# Altium PCB 四轴.PcbDoc
Units mm, origin at the board's own origin, x right, y up, seen from the top; angles counter-clockwise.
Board outline 99.94 x 99.97 mm, 2 copper layers (Top Layer, Bottom Layer); 73 components, 53 nets, 246 pads, 37 vias.
Unrouted connection lines stored in the file: 4.
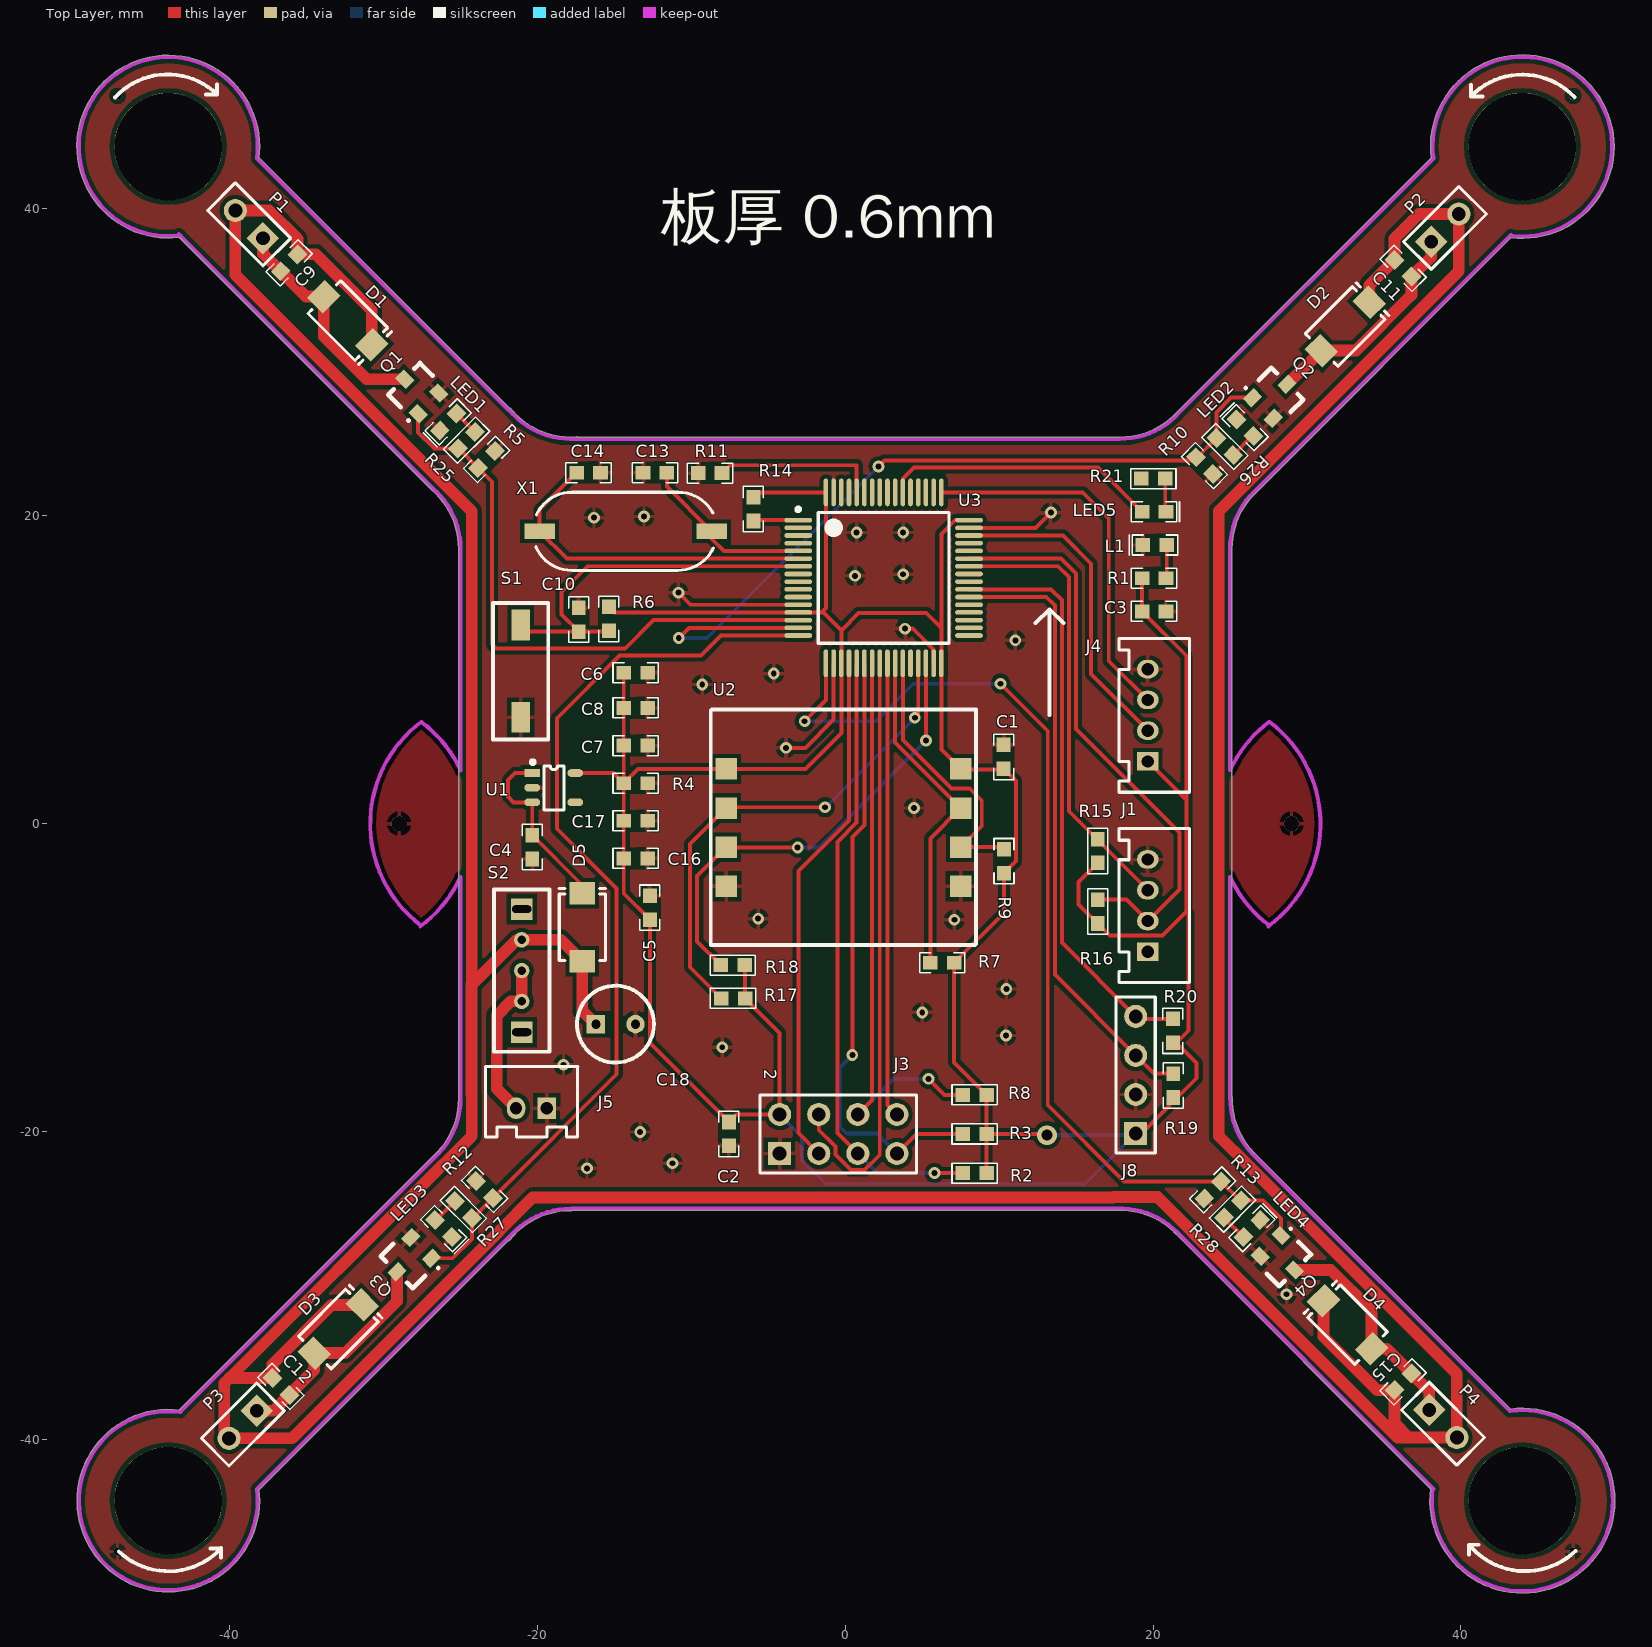
[diagram p0: Top Layer view]
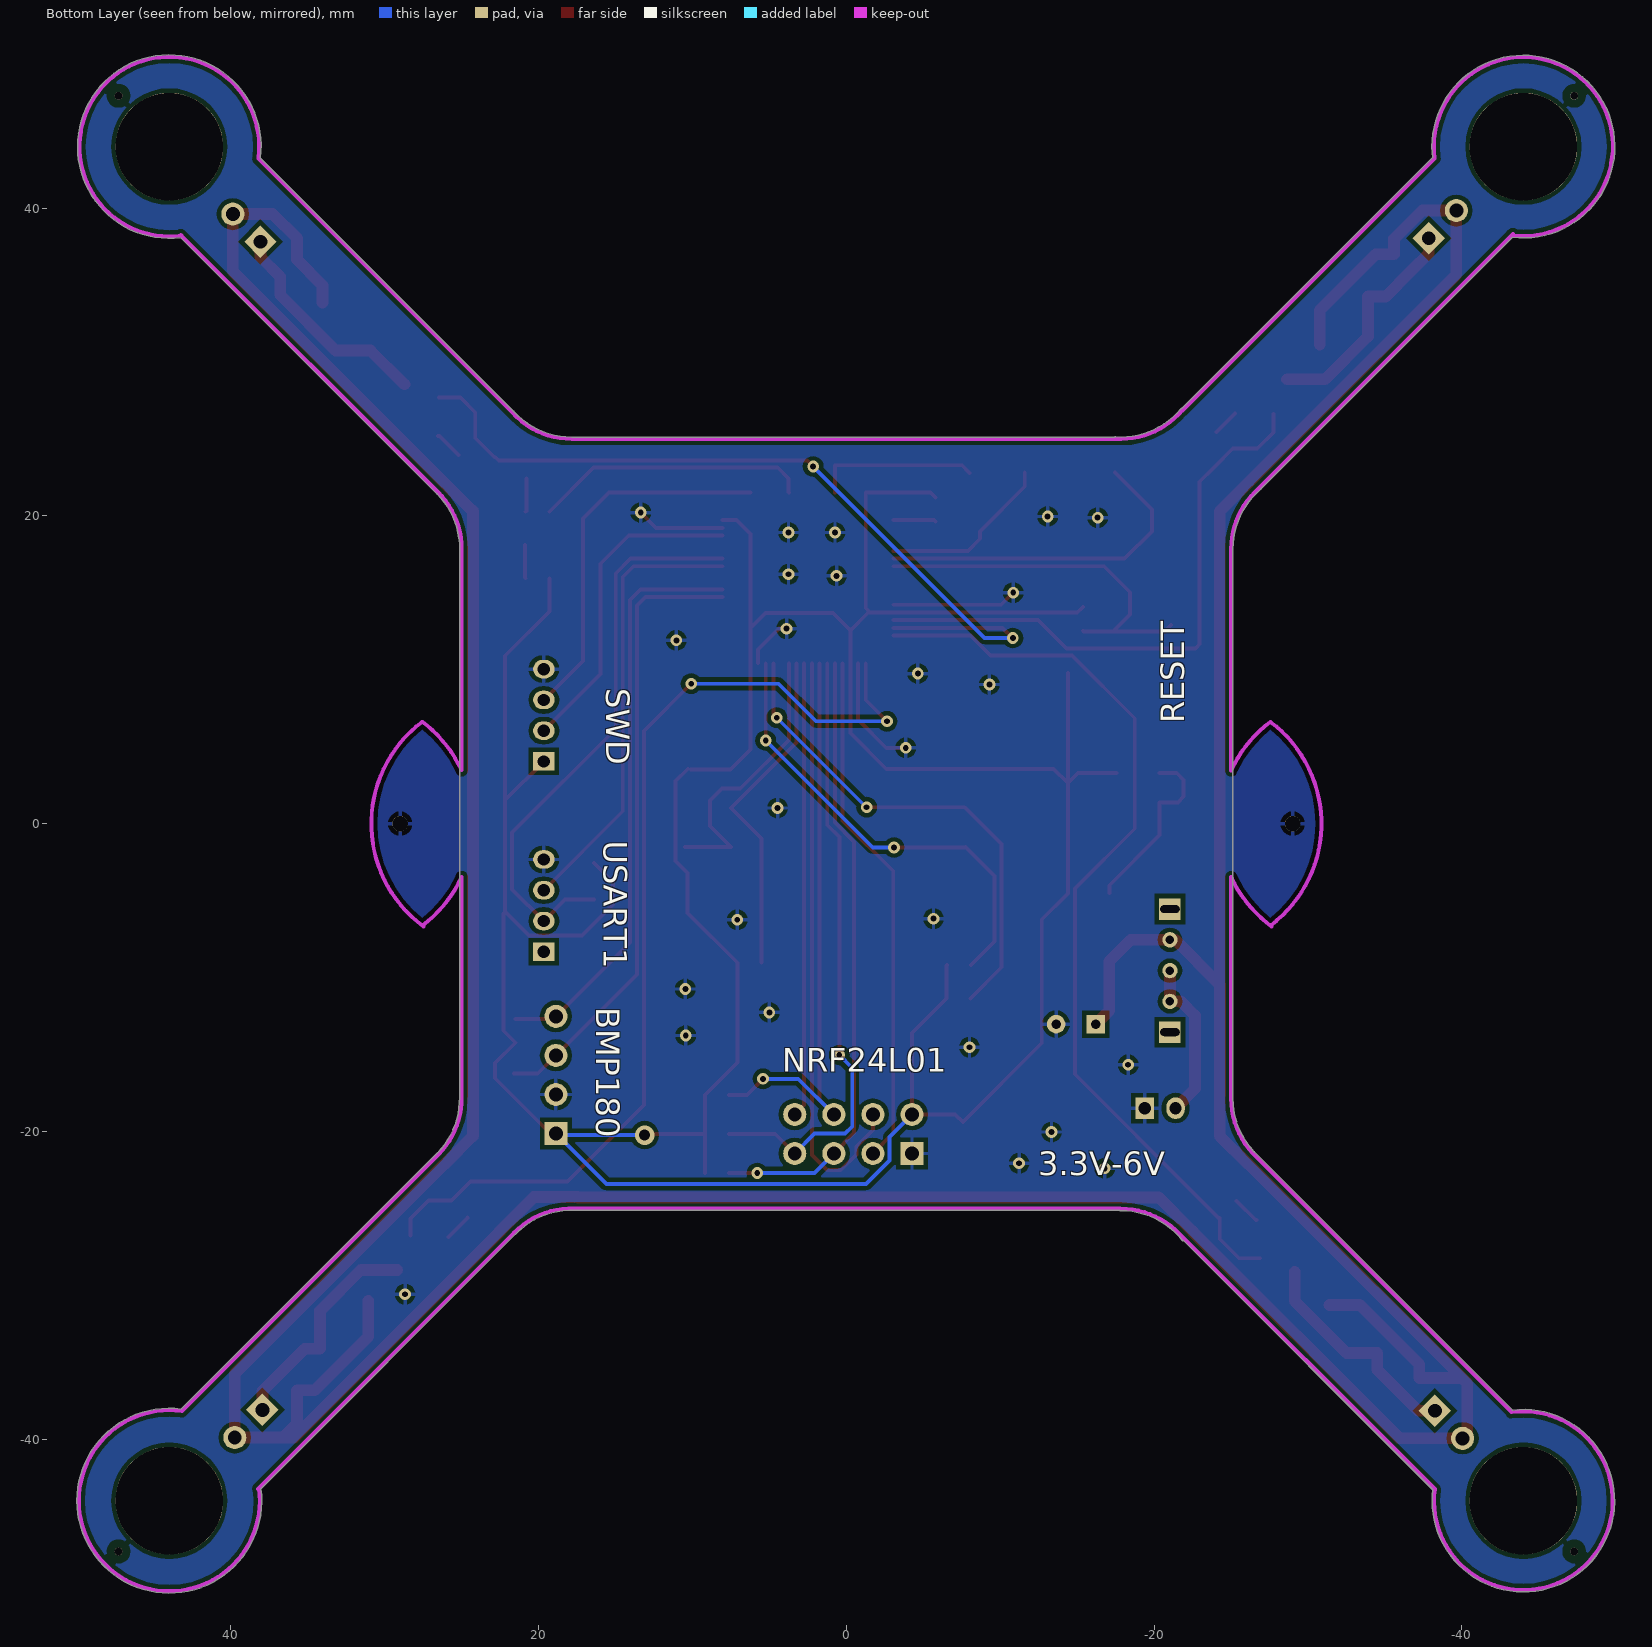
[diagram p1: Bottom Layer view, seen from below]

## Layer stack, top to bottom
Top Layer: signal copper 0.0356
Dielectric: dielectric 0.32, FR-4, Dk 4.8
Bottom Layer: signal copper 0.0356

## Board outline
-43.293,-38.112 ccw(c-44,-44) -38.07,-44 ccw(c-44,-44) -38.112,-43.293 -21.937,-27.118 ccw(c-21.929,-26.991) -21.829,-27.07 cw(c-17.856,-30.226) -17.828,-25.152 ccw(c-17.827,-25.024) -17.752,-25.127 17.63,-25.127 ccw(c17.653,-25.002) 17.658,-25.129 cw(c17.85,-30.2) 21.473,-26.647 ccw(c21.583,-26.583) 21.493,-26.673 38.044,-43.224 ccw(c44,-44) 50.006,-44 ccw(c44,-44) 43.224,-38.044 26.587,-21.406 ccw(c26.496,-21.496) 26.573,-21.395 cw(c30.21,-17.856) 25.136,-17.784 ccw(c25.009,-17.783) 25.136,-17.783 ccw(c25.009,-17.783) 25.127,-17.736 25.127,17.831 ccw(c25,17.831) 25.126,17.847 cw(c30.201,17.856) 26.602,21.433 ccw(c26.55,21.55) 26.64,21.46 43.264,38.084 ccw(c44,44) 49.961,44 ccw(c44,44) 38.084,43.264 21.622,26.802 ccw(c21.703,26.704) 21.608,26.789 cw(c17.852,30.201) 17.84,25.126 ccw(c17.824,25) 17.824,25.127 -17.434,25.127 ccw(c-17.484,25.01) -17.493,25.137 cw(c-17.833,30.2) -21.736,26.957 ccw(c-21.834,26.876) -21.823,27.003 -38.104,43.284 ccw(c-44,44) -38.061,44 ccw(c-44,44) -43.284,38.104 -26.944,21.764 ccw(c-26.824,21.808) -26.907,21.711 cw(c-30.2,17.85) -25.126,17.874 ccw(c-25,17.854) -25.127,17.854 -25.127,-17.856 ccw(c-25,-17.856) -25.126,-17.872 cw(c-30.201,-17.856) -26.494,-21.321 ccw(c-26.434,-21.434) -26.524,-21.344

## Design rules (kind name [scope] priority, off if disabled: settings)
Clearance Clearance_1 [InPolygon] p1: gap=0.279
Clearance mcu [InComponent('U3')] p2: gap=0.178
Clearance [All] p3: gap=0.203
ComponentClearance [All] p1: gap=0 collisioncheckmode=3 verticalgap=0 showdistances=TRUE
HoleSize [All] p1: absolutevalues=TRUE maxlimit=7.62 minlimit=0.203 maxpercent=80.000 minpercent=20.000
MinimumSolderMaskSliver [All] p1: minsoldermaskwidth=0.127
PolygonConnect [All] p1: connectstyle=Relief reliefconductorwidth=0.254 reliefentries=4 polygonreliefangle="90 Angle"
RoutingVias [All] p1: holewidth=0.381 width=0.762 viastyle="Through Hole" minholewidth=0.127 minwidth=0.254 maxholewidth=1.016 maxwidth=1.27
SilkToSilkClearance [All] p1: silktosilkclearance=0.178
SilkscreenOverComponentPads [All] p1: minsilkscreentomaskgap=0.127
SolderMaskExpansion [All] p1: expansion=0.102
Width [All] p1: maxlimit=1.27 minlimit=0.254 preferedwidth=0.254
23 further rules are at their usual default settings.

## Components (designator, comment, footprint, x,y, rotation, side; value= is the part's Value field where it differs from the comment)
C1 "0.1uF" 0603 10.287,4.343 r90 top
C2 "0.1uF" 0603 -7.569,-20.168 r270 top
C3 "0.1uF" 0603 20.069,13.792 r0 top
C4 "1uF" 0603 -20.345,-1.524 r90 top
C5 "10uF" 0603 -12.7,-5.461 r90 top
C6 "0.1uF" 0603 -13.621,9.804 r0 top
C7 "0.1uF" 0603 -13.621,5.074 r180 top
C8 "0.1uF" 0603 -13.621,7.518 r180 top
C9 "0.1uF" 0603 -36.144,36.449 r45 top
C10 "0.1uF" 0603 -17.323,13.259 r90 top
C11 "0.1uF" 0603 36.246,36.093 r135 top
C12 "0.1uF" 0603 -36.678,-36.576 r135 top
C13 "20pF" 0603 -12.37,22.809 r0 top
C14 "20pF" 0603 -16.688,22.809 r180 top
C15 "0.1uF" 0603 36.246,-36.271 r225 top
C16 "1uF" 0603 -13.621,-2.261 r180 top
C17 "0.1uF" 0603 -13.621,0.184 r180 top
C18 "100uF" CAP_5X8_2.5 -14.935,-13.03 r180 top
D1 "SS14" SMA -32.334,32.69 r315 top
D2 "SS14" SMA 32.487,32.309 r45 top
D3 "SS14" SMA -32.944,-32.842 r45 top
D4 "SS14" SMA 32.639,-32.563 r135 top
D5 "SS14" SMA -17.094,-6.731 r90 top
J1 "PH2.0-4P" PH2.0-4P 19.66,-3.327 r90 top
J3 "Header 4X2" HDR2X4 -4.267,-21.438 r0 top
J4 "PH2.0-4P" PH2.0-4P 19.66,9.042 r90 top
J5 "Header 2" PH2.0-2P -20.396,-18.491 r180 top
J8 "PH2.0-4P" HDR1X4 18.872,-20.142 r90 top
L1 "LED" 0603_LED 20.117,18.11 r180 top
LED1 "LED-Y" 0603_LED -25.806,26.111 r225 top
LED2 "LED-Y" 0603_LED 25.984,25.73 r135 top
LED3 "LED-Y" 0603_LED -26.111,-26.314 r315 top
LED4 "LED-Y" 0603_LED 26.416,-26.314 r45 top
LED5 "LED-Y" 0603_LED 20.069,20.269 r0 top
P1 "Header 2" HDR1X2 -37.846,38.049 r135 top
P2 "Header 2" HDR1X2 38.075,37.821 r45 top
P3 "Header 2" HDR1X2 -38.252,-38.151 r225 top
P4 "Header 2" HDR1X2 37.948,-38.1 r315 top
Q1 "AO3400" SOT-23 -27.864,28.092 r135 top
Q2 "AO3400" SOT-23 27.915,27.788 r45 top
Q3 "AO3400" SOT-23 -28.346,-28.346 r225 top
Q4 "AO3400" SOT-23 28.423,-28.219 r315 top
R1 "1K" 0603 20.069,15.951 r180 top
R2 "10K" C0603_M1608 8.407,-22.708 r180 top
R3 "10K" C0603_M1608 8.407,-20.168 r180 top
R4 "1K" 0603 -13.621,2.629 r180 top
R5 "10K" 0603 -23.317,23.673 r225 top
R6 "10K" 0603 -15.367,13.31 r270 top
R7 "10K" 0603 6.299,-9.042 r180 top
R8 "10K" C0603_M1608 8.407,-17.628 r180 top
R9 "10K" 0603 10.312,-2.438 r90 top
R10 "10K" 0603 23.343,23.266 r135 top
R11 "10K" 0603 -8.788,22.784 r180 top
R12 "10K" 0603 -23.444,-23.774 r315 top
R13 "10K" 0603 23.876,-23.8 r45 top
R14 "0R" 0603 -5.969,20.447 r270 top
R15 "10K" C0603_M1608 16.408,-1.778 r90 top
R16 "10K" C0603_M1608 16.408,-5.715 r90 top
R17 "10K" C0603_M1608 -7.29,-11.354 r0 top
R18 "10K" C0603_M1608 -7.315,-9.195 r0 top
R19 "10K" 0603 21.311,-17.018 r90 top
R20 "10K" 0603 21.285,-13.462 r90 top
R21 "1K" C0603_M1608 20.015,22.428 r0 top
R25 "1K" C0603_M1608 -24.613,24.917 r225 top
R26 "1K" C0603_M1608 24.663,24.511 r135 top
R27 "1K" C0603_M1608 -24.816,-25.07 r315 top
R28 "1K" C0603_M1608 25.171,-25.044 r45 top
S1 "SW-PB" SW-KEY -19.304,13.919 r270 top
S2 "SS12D07" SS-12D07 -21.031,-9.55 r270 top
U1 "XC6503D331" SOT23-5 -18.948,2.337 r0 top
U2 "MPU6050S" MPU6050S -7.747,3.556 r0 top
U3 "STM32F103RCT6" LQFP64_N 2.489,15.977 r0 top
X1 "8M" HC-49SMD -14.275,18.999 r0 top

## Footprints (in the part's own frame and the unit in brackets; to place one, negate y for a bottom-side part, rotate by r counter-clockwise, add the part's x,y. Pads: shape width x height; smd on the part's side, far side on the other; paste and mask are expansions set on the pad)
0603 [mm]
  rect 0.95x0.9 smd: 1(-0.775,0) 2(0.775,0)
  silkscreen extent -1.48,-0.65 1.47,0.65
0603_LED [mm]
  rect 0.95x0.9 smd: 1(-0.775,0) 2(0.775,0)
  silkscreen extent -1.48,-0.65 1.65,0.65
C0603_M1608 [mm] "Chip Capacitor, 2-Leads, Bo"
  rect 0.95x0.9 smd: 1(-0.775,0) 2(0.775,0)
  silkscreen extent -1.48,-0.65 1.48,0.65
CAP_5X8_2.5 [mm]
  rect 1.2x1.2 hole 0.6: 1(1.275,0)
  round 1.2 hole 0.6: 2(-1.3,0)
  silkscreen extent -2.5,-2.5 2.5,2.5
HC-49SMD [mm]
  rect 2x1 smd: 1(-5.588,0) 2(5.588,0)
  silkscreen extent -5.84,-2.54 5.7,2.54
HDR1X2 [mm] "Connector; Hea"
  rect 1.5x1.5 hole 0.9: 1(0,0)
  round 1.5 hole 0.9: 2(2.54,0)
  silkscreen extent -1.27,-1.27 3.81,1.27
HDR1X4 [mm] "Connector; H"
  rect 1.5x1.5 hole 0.9: 1(0,0)
  round 1.5 hole 0.9: 2(2.54,0) 3(5.08,0) 4(7.62,0)
  silkscreen extent -1.27,-1.27 8.89,1.27
HDR2X4 [mm] "Connector; Heade"
  rect 1.5x1.5 hole 0.9: 1(0,0)
  round 1.5 hole 0.9: 2(0,2.54) 3(2.54,0) 4(2.54,2.54) 5(5.08,0) 6(5.08,2.54) 7(7.62,0) 8(7.62,2.54)
  silkscreen extent -1.27,-1.27 8.89,3.81
LQFP64_N [mm]
  oval 1.8x0.3 smd: 1(-5.55,3.75) 2(-5.55,3.25) 3(-5.55,2.75) 4(-5.55,2.25) 5(-5.55,1.75) 6(-5.55,1.25) 7(-5.55,0.75) 8(-5.55,0.25) 9(-5.55,-0.25) 10(-5.55,-0.75) 11(-5.55,-1.25) 12(-5.55,-1.75) 13(-5.55,-2.25) 14(-5.55,-2.75) 15(-5.55,-3.25) 16(-5.55,-3.75) 33(5.55,-3.75) 34(5.55,-3.25) 35(5.55,-2.75) 36(5.55,-2.25) 37(5.55,-1.75) 38(5.55,-1.25) 39(5.55,-0.75) 40(5.55,-0.25) 41(5.55,0.25) 42(5.55,0.75) 43(5.55,1.25) 44(5.55,1.75) 45(5.55,2.25) 46(5.55,2.75) 47(5.55,3.25) 48(5.55,3.75)
  oval 0.3x1.8 smd: 17(-3.75,-5.55) 18(-3.25,-5.55) 19(-2.75,-5.55) 20(-2.25,-5.55) 21(-1.75,-5.55) 22(-1.25,-5.55) 23(-0.75,-5.55) 24(-0.25,-5.55) 25(0.25,-5.55) 26(0.75,-5.55) 27(1.25,-5.55) 28(1.75,-5.55) 29(2.25,-5.55) 30(2.75,-5.55) 31(3.25,-5.55) 32(3.75,-5.55) 49(3.75,5.55) 50(3.25,5.55) 51(2.75,5.55) 52(2.25,5.55) 53(1.75,5.55) 54(1.25,5.55) 55(0.75,5.55) 56(0.25,5.55) 57(-0.25,5.55) 58(-0.75,5.55) 59(-1.25,5.55) 60(-1.75,5.55) 61(-2.25,5.55) 62(-2.75,5.55) 63(-3.25,5.55) 64(-3.75,5.55)
  silkscreen extent -5.67,-4.25 4.25,4.57, body extent -5,-5 5,5, height 1.6
MPU6050S [mm]
  rect 1.4x1.4 smd: 1(0,0) 2(0,-2.54) 3(0,-5.08) 4(0,-7.62) 5(15.24,0) 6(15.24,-2.54) 7(15.24,-5.08) 8(15.24,-7.62)
  silkscreen extent -1,-11.43 16.25,3.88
PH2.0-2P [mm]
  rect 1.2x1.4 hole 0.8: 1(-1,0)
  oval 1.2x1.4 hole 0.8: 2(1,0)
  silkscreen extent -3.01,-2.72 3,1.88
PH2.0-4P [mm]
  rect 1.2x1.4 hole 0.8: 1(-5,0)
  oval 1.2x1.4 hole 0.8: 2(-3,0) 3(-1,0) 4(1,0)
  silkscreen extent -7.01,-2.72 3,1.88
SMA [mm]
  rect 1.45x1.65 smd: 1(-2.21,0) 2(2.21,0)
  silkscreen extent -2.16,-1.5 2.51,1.5
SOT23-5 [mil] "SOT23, 5-Leads, Body 3.1x3.0mm (max), Pitch"
  rect 40x20 smd: 1(-55,37.4)
  oval 40x20 smd: 2(-55,0) 3(-55,-37.4) 4(55,-37.4) 5(55,37.4)
  silkscreen extent -59,-57 26,70
SOT-23 [mm]
  rect 1x0.8 smd: 1(-1.1,0.952) 2(-1.1,-0.952) 3(1.1,-0.013)
  silkscreen extent -0.97,-1.46 1.14,1.71
SS-12D07 [mm]
  round 1 hole 0.55: 1(-2,0) 2(0,0) 3(2,0)
  rect 1.4x1.4 hole 0.5 slot 1.25 at 90 deg: ""(-4,0) ""(4,0)
  silkscreen extent -5.28,-1.8 5.28,1.8
SW-KEY [mm]
  rect 2x1.2 smd: 1(1,-1.8) 2(7,-1.8)
  silkscreen extent -0.43,-3.6 8.45,0

## Part data
C1 C2 C3 C4 C5 C6 C7 C8 C9 C10 C11 C12 C13 C14 C15 C16 C17: library part Cap, "Cap"
C18: library part Cap2
J1 J4: library part "Header 4", "Header,"
J3: "Header, 4-Pin, Dual row"
J5: "Header,"
J8: library part "Header 4", "Header, 4-Pin"
P1 P2 P3 P4: "Header, 2-Pin"
Q1 Q2 Q3 Q4: library part MOS-N
R1 R4 R5 R6 R7 R9 R10 R11 R12 R13 R14 R19 R20: library part Res1, "Re"
R2 R3 R8 R15 R16 R17 R18 R21 R25 R26 R27 R28: library part Res, "电阻0603"
U1: library part XC6503Dxxx
U3: "256K Flash 48K RAM"

## Free pads (board coordinates)
  round 7 hole 7: 0(-44,-44) 0(-44,44) 0(44,-44) 0(44,44)
  round 1 hole 1: 0(-29,0) 0(29,0)
  round 0.5 hole 0.5: 1(-47.3,-47.3) 1(-47.3,47.3) 1(47.3,-47.3) 1(47.3,47.3)

## Via types
v1: diameter 0.762, hole 0.381, Top Layer to Bottom Layer, tented both sides, 22 vias
v2: diameter 0.762, hole 0.381, Top Layer to Bottom Layer, 14 vias
v3: diameter 1.27, hole 0.711, Top Layer to Bottom Layer, tented both sides, 1 vias

## Nets (pads, with @x,y where several pads share a name; then routed paths per layer and width w, separated by ;. In a path a pad name is that pad's centre, name@x,y a point inside that pad or via, vN(x,y) a via of type N, cw(c..) or ccw(c..) an arc to the next point about the centre after c; other vN are vias at no path point)
BMP180_SCL: J8.3 R19.2 U3.38 | length 40.4
  Top Layer w0.254: U3.38 13.061,14.727 13.614,14.173 13.614,-9.804 J8.3 20.053,-16.243 R19.2@21.59,-16.243
BMP180_SDA: J8.4 R20.2 U3.39 | length 38.1
  Top Layer w0.254: U3.39 13.374,15.227 14.072,14.529 14.072,-7.722 J8.4 19.037,-12.687 R20.2@21.514,-12.687
BOOT0: R11.1 U3.60 | length 10.7
  Top Layer w0.254: R11.1 -7.505,23.292 0.739,23.292 U3.60
ESP_CH_PD: U3.40
ESP_GP0: U3.2
ESP_GP2: U3.3
ESP_GP16: U3.4
ESP_URXD: U3.51
ESP_UTXD: U3.52
GND: C1.2 C2.2 C3.2 C4.1 C5.2 C6.2 C7.1 C8.1 C10.2 C13.1 C14.1 C16.1 C17.1 C18.2 J1.4 J3.1 J4.4 J5.1 J8.2 L1.2 LED1.2 LED2.2 LED3.2 LED4.2 pad.0@29,0 pad.0@-29,0 pad.1@47.3,-47.3 pad.1@-47.3,-47.3 Q1.2 Q2.2 Q3.2 Q4.2 R4.1 R5.1 R10.1 R11.2 R12.1 R13.1 R21.1 S1.2 U1.2 U2.4 U2.8 U3.12 U3.18 U3.31 U3.47 U3.63 | length 24.7
  Top Layer w0.254: v1(-10.846,15.011) -10.061,14.227 U3.12 ; v1(-3.861,4.928) -2.591,4.928 -0.761,6.758 U3.18 ; v1(3.886,12.675) 4.384,12.675 5.739,11.32 U3.31 ; U3.47 12.369,19.227 v1(13.36,20.218)
  other v1: 28.677,-30.582 10.439,-13.767 10.465,-10.744 7.087,-6.248 -5.664,-6.172 -16.332,19.888 -13.081,19.964
  other v2: -16.789,-22.403 -11.227,-22.073 -13.335,-20.041 -18.313,-15.672 -8.001,-14.529 5.004,-12.268 4.47,1.016 -9.296,9.042 -4.648,9.754 11.049,11.913 0.635,16.104 3.759,16.205 0.737,18.923 3.759,18.923
HC-RX: U3.53
M1_PWM: Q1.1 R5.2 R25.2 U3.14 | length 38.7
  Top Layer w0.254: Q1.1 -27.76,25.423 -26.706,24.369 R25.2 -25.11,24.369 R5.2 -22.962,22.221 -22.962,11.659 -22.682,11.379 -14.3,11.379 -12.453,13.227 U3.14
M2_PWM: Q2.1 R10.2 R26.2 U3.15 | length 52.8
  Top Layer w0.254: v1(-10.82,12.065) -10.159,12.727 U3.15 ; v1(2.159,23.216) 2.54,23.597 22.577,23.597 R10.2 22.871,23.814 R26.2 24.115,26.732 25.067,27.683 Q2.1
  Bottom Layer w0.254: v1(-10.82,12.065) -8.992,12.065 v1(2.159,23.216)
M3_PWM: Q3.1 R12.2 R27.2 U3.16 | length 60.4
  Top Layer w0.254: Q3.1 -25.524,-28.242 -24.268,-26.986 R27.2 -24.192,-25.618 R12.2 -14.859,-16.285 -14.859,-4.216 -18.745,-0.33 -18.745,6.848 -14.671,10.922 -9.373,10.922 -8.068,12.227 U3.16
M4_PWM: Q4.1 R13.2 R28.2 U3.17 | length 66.1
  Top Layer w0.254: v1(-2.642,6.655) -1.261,8.036 U3.17 ; v1(10.084,9.093) 13.157,6.02 13.157,-18.288 18.121,-23.252 R13.2 25.669,-24.496 R28.2 27.163,-24.496 28.318,-25.651 Q4.1
  Bottom Layer w0.254: v1(-2.642,6.655) 1.981,6.655 4.42,9.093 v1(10.084,9.093)
MPU6050_RX: R17.1 U2.2 U3.29 | length 32.7
  Top Layer w0.254: R17.1 -10.084,-9.335 -10.084,-1.321 U2.2 -7.696,1.067 v1(-1.321,1.067) ; v1@4.521,6.655 v1(4.521,6.883) 4.739,7.101 U3.29
  Bottom Layer w0.254: v1(-1.321,1.067) -1.295,1.067 v1(4.521,6.883)
MPU6050_SCL: R7.2 U2.6 U3.26 | length 22
  Top Layer w0.254: U3.26 3.239,5.27 U2.6 5.524,-0.953 R7.2
MPU6050_SDA: R9.2 U2.7 U3.27 | length 18.4
  Top Layer w0.254: U3.27 3.739,5.443 6.896,2.286 8.09,2.286 8.865,1.511 8.865,-0.152 U2.7 R9.2@10.503,-1.524
MPU6050_TX: R18.1 U2.3 U3.30 | length 30
  Top Layer w0.254: R18.1 -9.627,-7.658 -9.627,-3.404 U2.3 -7.722,-1.549 v1(-3.099,-1.549) ; v1(5.239,5.403) U3.30
  Bottom Layer w0.254: v1(-3.099,-1.549) -1.714,-1.549 v1(5.239,5.403)
NetC4_2: C4.2 D5.2 U1.1 U1.3 | length 11.7
  Top Layer w0.254: U1.3@-20.476,1.387 -21.554,1.387 -21.92,1.753 -21.92,2.84 -21.473,3.287 U1.1 ; U1.3 C4.2 -17.094,-4 D5.2
NetC9_1: C9.1 D1.1 P1.1 Q1.3 | length 15.1
  Top Layer w0.762: P1.1 -37.846,37.055 C9.1 -35.044,34.252 D1.1 -33.897,31.662 -31.114,28.879 Q1.3
NetC11_1: C11.1 D2.1 P2.1 Q2.3 | length 14.5
  Top Layer w0.762: Q2.3 28.734,28.556 D2.1 33.185,30.746 36.794,34.355 C11.1 38.075,36.826 P2.1
NetC12_1: C12.1 D3.1 P3.1 Q3.3 | length 14.6
  Top Layer w0.762: P3.1 -37.156,-38.151 C12.1 -34.506,-35.501 D3.1 -32.513,-34.405 -29.133,-31.025 Q3.3
NetC13_2: C13.2 U3.5 X1.2 | length 11.5
  Top Layer w0.254: C13.2 -11.595,21.907 X1.2 -8.687,18.517 -7.897,17.727 U3.5
NetC14_2: C14.2 U3.6 X1.1 | length 22.3
  Top Layer w0.254: C14.2 -19.863,20.409 X1.1 -18.09,17.227 U3.6
NetC15_1: C15.1 D4.1 P4.1 Q4.3 | length 14.7
  Top Layer w0.762: Q4.3 31.546,-29.006 34.202,-31.662 D4.1 35.196,-34.125 C15.1 37.948,-36.877 P4.1
NetJ5_2: J5.2 S2.2 S2.3 | length 10.5
  Top Layer w0.762: J5.2 -22.657,-17.231 -22.657,-12.471 -21.736,-11.55 S2.3 S2.2
NetL1_1: L1.1 R1.1 | length 2.2
  Top Layer w0.254: R1.1 20.892,15.999 L1.1
NetLED1_1: LED1.1 R25.1 | length 1.7
  Top Layer w0.254: LED1.1 R25.1
NetLED2_1: LED2.1 R26.1 | length 1.8
  Top Layer w0.254: R26.1 26.431,25.182 LED2.1
NetLED3_1: LED3.1 R27.1 | length 1.8
  Top Layer w0.254: LED3.1 -26.608,-25.766 R27.1
NetLED4_1: LED4.1 R28.1 | length 1.8
  Top Layer w0.254: R28.1 24.623,-25.618 LED4.1
NetLED5_1: LED5.1 U3.54 | length 17.9
  Top Layer w0.254: U3.54 3.759,21.547 3.759,22.44 4.459,23.139 16.424,23.139 LED5.1
NetLED5_2: LED5.2 R21.2 | length 2.2
  Top Layer w0.254: R21.2 20.79,20.323 LED5.2
NetR14_2: R14.2 U3.1 | length 2.8
  Top Layer w0.254: R14.2@-5.791,19.647 -5.711,19.727 U3.1
NRF_CE: J3.3 U3.20 | length 33.8
  Top Layer w0.254: J3.3 -3.048,-20.117 -3.048,-3.073 0.239,0.214 U3.20
NRF_CSN: J3.4 U3.24 | length 38.7
  Top Layer w0.254: J3.4 -1.727,-19.91 -0.647,-20.99 -0.647,-21.505 0.365,-22.518 1.26,-22.518 2.239,-21.539 U3.24
NRF_IRQ: J3.8 U3.25 | length 29.6
  Top Layer w0.254: U3.25 2.739,-18.284 J3.8
NRF_MISO: J3.7 R3.2 U3.22 | length 40
  Top Layer w0.254: v1(0.457,-15.037) 0.457,-0.861 1.239,-0.079 U3.22 ; J3.7 4.623,-20.168 R3.2
  Bottom Layer w0.254: v1(0.457,-15.037) -0.381,-15.875 -0.381,-19.685 0.076,-20.142 2.057,-20.142 J3.7
NRF_MOSI: J3.6 R8.2 U3.23 | length 37.9
  Top Layer w0.254: J3.6 1.739,-17.971 U3.23 ; v1(5.41,-16.586) 6.452,-17.628 R8.2
  Bottom Layer w0.254: J3.6 3.124,-16.586 v1(5.41,-16.586)
NRF_SCK: J3.5 R2.2 U3.21 | length 40.3
  Top Layer w0.254: U3.21 0.739,0.067 -0.508,-1.18 -0.508,-20.117 J3.5 ; v1(5.791,-22.708) R2.2
  Bottom Layer w0.254: J3.5 2.083,-22.708 v1(5.791,-22.708)
OLED_CS: U3.33
OLED_D0_SCK: U3.34
OLED_D1_MOSI: U3.36
OLED_DC: U3.37
OLED_RES: U3.35
RST: C10.1 R6.2 S1.1 U3.7 | length 25
  Top Layer w0.254: S1.1 -20.669,12.484 C10.1 ; R6.2 -15.418,12.484 C10.1 ; U3.7 -16.751,16.727 -18.44,15.037 -18.44,13.601 C10.1
SWCLK: J4.3 U3.49 | length 24.4
  Top Layer w0.254: U3.49 15.43,21.527 17.12,19.837 17.12,10.582 J4.3
SWDIO: J4.2 U3.46 | length 21.1
  Top Layer w0.254: U3.46 14.141,18.727 15.977,16.891 15.977,9.725 J4.2
UART1RX: J1.2 R16.2 U3.43 | length 37.4
  Top Layer w0.254: U3.43 14.015,17.227 14.986,16.256 14.986,6.147 21.717,-0.584 21.717,-4.27 J1.2 18.272,-4.94 R16.2
UART1TX: J1.3 R15.2 U3.42 | length 29.3
  Top Layer w0.254: U3.42 13.83,16.727 14.529,16.027 14.529,0.803 J1.3
VCC-3.3V: C1.1 C2.1 C3.1 C5.1 C6.1 C7.2 C8.2 C16.2 C17.2 J3.2 J4.1 J8.1 R1.2 R2.1 R3.1 R4.2 R6.1 R7.1 R8.1 R9.1 R14.1 R15.1 R16.1 R17.2 R18.2 R19.1 R20.1 U1.5 U2.1 U2.5 U3.13 U3.19 U3.32 U3.48 U3.64 | length 249.4
  Top Layer w0.254: U1.5 -15.054,3.287 R4.2 ; R6.1 -15.009,13.727 U3.13 -1.544,13.727 ; C6.1 R4.2 ; R18.2 -6.515,-9.22 R17.2 -4.267,-13.601 J3.2 -7.074,-18.898 C2.1 -12.7,-14.262 C5.1 -14.396,-4.54 C16.2 R4.2 ; R14.1@-5.791,21.197 -5.461,21.527 U3.64 -1.261,14.01 -1.544,13.727 ; 6.239,12.709 5.258,13.691 0.864,13.691 -0.261,12.566 ; U3.48 7.146,19.727 6.239,18.82 U3.32 6.239,4.81 U2.5 7.531,3.518 C1.1@10.109,3.518 ; R2.1 R3.1 ; C1.1 11.093,2.763 11.093,-2.433 R9.1 10.312,-5.804 R7.1 7.074,-15.519 R8.1 R3.1 ; v3(13.106,-20.244) 13.03,-20.168 R3.1 ; R15.1 15.164,-3.798 15.164,-5.245 R16.1 17.183,-7.264 20.625,-7.264 22.174,-5.715 ; J8.1 19.241,-20.142 22.835,-16.548 22.835,-15.558 21.514,-14.237 22.294,-13.457 22.294,-5.835 22.174,-5.715 ; R1.2 C3.1 22.174,10.912 22.174,1.528 ; J4.1 22.174,1.528 ; R4.2 -13.469,3.556 U2.1 -2.591,3.556 -0.261,5.886 U3.19 -0.261,12.566 ; -1.544,13.727 -1.421,13.727 -0.261,12.566 ; 22.174,-5.715 22.174,1.528
  Bottom Layer w0.254: J3.2 -2.807,-20.357 -2.807,-21.885 -1.274,-23.419 15.596,-23.419 J8.1@18.771,-20.244 ; v3(13.106,-20.244) J8.1@18.771,-20.244 ; J8.1 J8.1@18.771,-20.244
VCC-5V: C9.2 C11.2 C12.2 C15.2 C18.1 D1.2 D2.2 D3.2 D4.2 D5.1 P1.2 P2.2 P3.2 P4.2 S2.1 | length 338.6
  Top Layer w0.762: D3.2 -33.374,-31.28 -37.226,-35.131 C12.2 -40.022,-36.028 ; D1.2 -30.772,33.362 -34.406,36.997 C9.2 -35.596,38.009 -37.432,39.845 P1.2 -39.642,35.68 -24.269,20.307 -24.269,-10.458 ; C18.1 -17.094,-12.146 D5.1 -18.485,-7.55 S2.1 -21.361,-7.55 -24.269,-10.458 ; D4.2 31.076,-33.337 34.559,-36.819 C15.2 35.698,-38.967 36.627,-39.896 ; D2.2 34.049,34.993 C11.2 35.698,38.035 37.28,39.617 P2.2 39.871,35.914 24.27,20.313 24.27,-20.297 26.14,-22.167 26.162,-22.167 39.744,-35.749 P4.2 36.627,-39.896 ; -40.022,-36.028 -40.353,-36.359 -40.353,-39.642 P3.2 -35.953,-39.947 -22.489,-26.483 -22.489,-26.471 -20.307,-24.289 17.419,-24.289 17.439,-24.269 20.307,-24.269 22.514,-26.476 22.514,-26.508 35.902,-39.896 36.627,-39.896 ; -40.022,-36.028 -26.102,-22.108 -26.073,-22.108 -24.27,-20.304 -24.27,-17.638 -24.289,-17.619 -24.289,-10.478 -24.269,-10.458
pads on no net: J1.1 S2. U1.4 U3.8 U3.9 U3.10 U3.11 U3.28 U3.41 U3.44 U3.45 U3.50 U3.55 U3.56 U3.57 U3.58 U3.59 U3.61 U3.62

## Polygon pours and split planes (outlines as drawn)
GND on Top Layer "Bottom Layer-No Net" (solid, remove dead copper, pour order 4): -58.344,54.356 -58.115,54.127 -58.115,-59.487 64.059,-59.487 66.091,-57.455 58.877,-50.241 58.877,52.781
GND on Bottom Layer "Bottom Layer-No Net" (solid, remove dead copper, pour order 6): -62.586,60.833 -62.586,-51.587 -56.286,-57.887 -56.109,-57.709 61.468,-57.709 61.468,61.392 61.671,61.595

## Keep-outs
Keep-Out Layer:
  lines w0.254: -43.318,38.318 -26.816,21.816 ; -43.232,-38.232 -26.434,-21.434 ; -43.213,-38.251 ccw(c-44,-44) -38.245,-43.256 ; -43.211,38.242 cw(c-44,44) -38.238,43.239 -21.855,26.855 ; -38.251,-43.251 -21.338,-26.338 ; -27.627,-6.671 ccw(c-32.512,0) -25.009,-3.475 ; -27.578,-6.615 cw(c-22.606,-0.008) -27.557,6.614 ; -27.55,6.614 cw(c-32.512,0) -25,3.455 -25,17.854 ; -26.824,21.808 cw(c-30.2,17.85) -24.998,17.854 ; -26.429,-21.438 ccw(c-30.201,-17.856) -24.999,-17.856 ; -25,-17.78 -25,-3.475 ; -21.929,-26.991 cw(c-17.856,-30.226) -17.827,-25.024 ; -21.834,26.876 ccw(c-17.833,30.2) -17.484,25.01 ; -17.802,-25 17.653,-25 ; -17.484,25 17.824,25 ; 17.653,-25.002 cw(c17.85,-30.2) 21.586,-26.58 ; 17.824,24.999 ccw(c17.852,30.201) 21.703,26.704 ; 21.583,-26.583 38.229,-43.229 ; 21.703,26.703 38.216,43.216 ; 24.999,17.831 cw(c30.201,17.856) 26.544,21.555 ; 25,-17.783 25,-3.465 ; 25,3.473 25,17.831 ; 25.005,-3.465 ccw(c32.512,0) 27.54,-6.606 ; 25.008,3.473 cw(c32.512,0) 27.561,6.623 ; 25.009,-17.783 ccw(c30.21,-17.856) 26.495,-21.497 ; 26.496,-21.496 43.184,-38.184 ; 26.55,21.55 43.254,38.254 ; 27.491,-6.671 ccw(c22.606,0) 27.568,6.614 ; 38.177,-43.192 ccw(c44,-44) 43.192,-38.177 ; 38.214,43.255 cw(c44,44) 43.219,38.218

## Silkscreen, mask and mechanical layers (free items; w line width, h text height)
Top Overlay:
  lines w0.254: -47.456,47.196 cw(c-44.045,44.075) -40.829,47.396 ; -47.219,-47.295 ccw(c-43.994,-43.915) -40.564,-47.087 ; -41.554,47.396 -40.829,47.396 ; -41.259,-47.099 -40.576,-47.099 -40.564,-47.087 ; -40.829,48.045 -40.829,47.396 ; 12.37,13.03 13.259,13.919 13.259,7.061 ; 13.284,13.919 14.173,13.03 ; 40.54,-47.515 40.54,-46.863 ; 40.653,48.019 40.653,47.269 ; 41.148,-46.863 40.54,-46.863 ; 41.427,47.269 40.653,47.269 ; 47.382,47.225 ccw(c43.996,44.021) 40.653,47.269 ; 47.453,-47.266 cw(c44.184,-43.853) 40.54,-46.863 ; -40.564,-47.087 -40.564,-47.699 -40.564,-47.087
  text "板厚 0.6mm" at -11.963,37.109 h5
Bottom Overlay:
  text "SWD" at 15.596,8.814 h1.52 r90
  text "RESET" at -21.946,6.528 h1.52 r270
  text "USART1" at 15.773,-1.118 h1.52 r90
  text "BMP180" at 16.256,-11.938 h1.52 r90
  text "NRF24L01" at 4.166,-16.129 h1.52
  text "3.3V-6V" at -12.471,-22.86 h1.52
Drill Drawing:
  text ".LEGEND" at 3.31,-61.119 h0.8
  text "100 * 100 mm" at -29.278,-61.83 h0.8
  text "Drill Drawing." at 3.437,-64.421 h0.8

## Text inside footprints (layer, text, board x,y; h text height)
J3: Top Overlay "2" at -5.283,-15.977 h0.8 r270